# EAGLE board avr_g1000r_24 (EAGLE 9.4.0)
switch and encoder positions ok hole positions ok v4: swapped PB3 - PA5 v5: rework: swap RKJX footprint, E37 flange holes reposition, crosschek drills added C8, C6 from AREF to VCC v8 repositioned, origin and all measuring new aligned drills with case v9 replaced 100n, 22p to 0402 moved drill next to MCU Y+2mm to north, already commited in caqse vector font DRC ok v20: RJKX enlarge pads Alps EC GND drill 2.65mm swap D+/D- DRC ok v21 Testpoints cleanup part names DRC v22 replace tact switches, drills 2mm DRC ok v23 holes for testpins v24 Testpins d 1mm, pitch 1.27 DRC ok
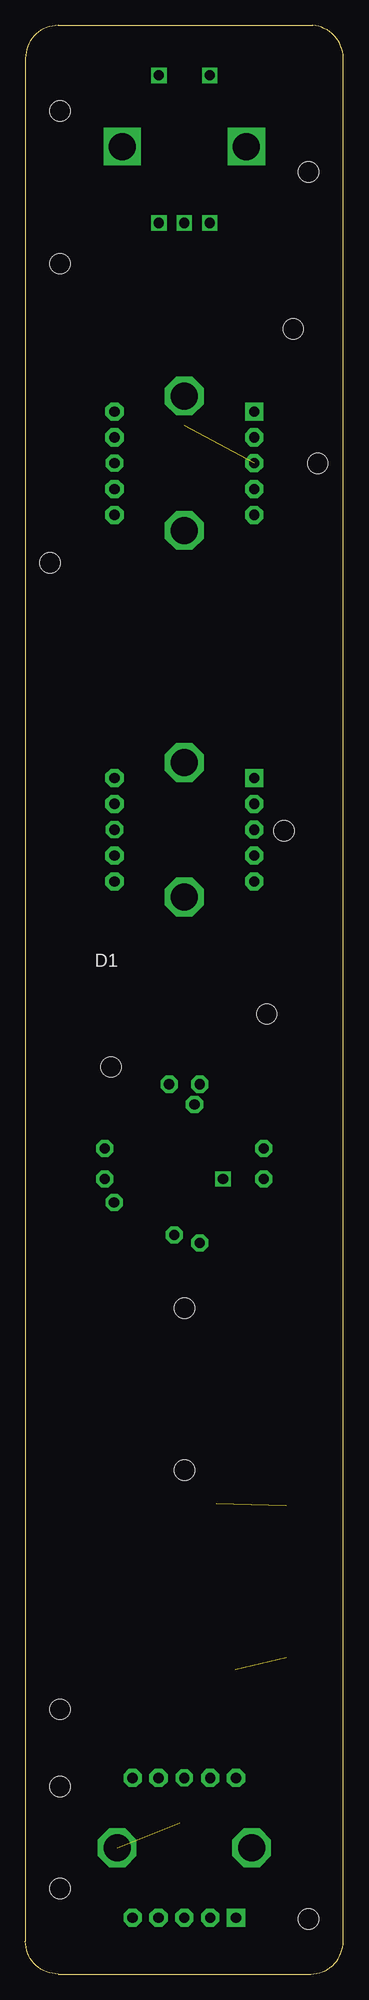
[diagram p0: board, top side]
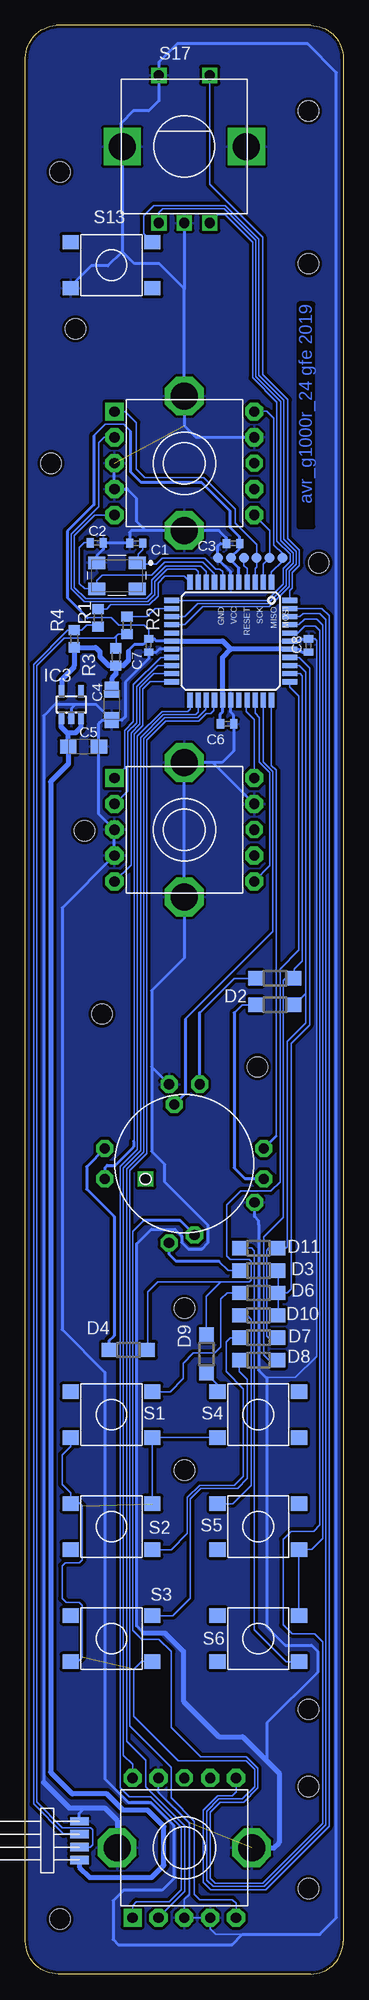
[diagram p1: board, bottom side, seen from below]

Size 31.2 x 191.4 mm. Coordinates in mm from the lower left corner, seen from the top.
Outline: 3.2,0 28,0 arc90 31.2,3.2 31.2,188.2 arc86 28.2,191.4 3.2,191.4 arc90 0,188.2 0,3.2 arc90 3.2,0
Copper layers (1*16): Top 0.035mm / dielectric 1.5mm / Bottom 0.035mm
Design rules "default *": minimum track width 6mil, minimum drill 0.35mm, track to track 6mil, track to pad 6mil, pad to pad 6mil, via to via 6mil, smd to smd 6mil, copper to edge 12mil, drill to drill 6mil, minimum pad ring 10mil, minimum via ring 8mil, stop-mask expansion 4mil, vias tented up to drill 0mil, thermal gap 10mil
Net classes: 0 default: width 0.15 mm, clearance 0.15 mm; 1 GND: width 0.3 mm, clearance 0.15 mm; 2 VCC: width 0.3 mm, clearance 0.15 mm
Holes 2 mm at 3.4,183 27.8,177 3.4,168 28.7,148.4 2.4,138.6 25.4,112.3 23.7,94.3 15.6,65.4 15.6,49.5 3.4,18.4 27.8,5.4 3.4,8.4 26.3,161.6 8.4,89.1 3.4,26

## Footprints (pad centres in the part's own frame; a part is rotated, then mirrored left to right if it is on the bottom)
C0402 = smd 0.7 x 0.9: 1 -0.65,0; 2 0.65,0
SMC_A = smd 1.6 x 1.4: + -1.5,0; - 1.5,0
SOD123 = smd 1.4 x 1.4: A 1.9,0; C -1.9,0
TP10R = smd 1 x 1: TP 0,0
TQFP44 = smd 1.5 x 0.5: 1 -5.8,4; 2 -5.8,3.2; 3 -5.8,2.4; 4 -5.8,1.6; 5 -5.8,0.8; 6 -5.8,0; 7 -5.8,-0.8; 8 -5.8,-1.6; 9 -5.8,-2.4; 10 -5.8,-3.2; 11 -5.8,-4; 23 5.8,-4; 24 5.8,-3.2; 25 5.8,-2.4; 26 5.8,-1.6; 27 5.8,-0.8; 28 5.8,0; 29 5.8,0.8; 30 5.8,1.6; 31 5.8,2.4; 32 5.8,3.2; 33 5.8,4 | smd 0.5 x 1.5: 12 -4,-5.8; 13 -3.2,-5.8; 14 -2.4,-5.8; 15 -1.6,-5.8; 16 -0.8,-5.8; 17 0,-5.8; 18 0.8,-5.8; 19 1.6,-5.8; 20 2.4,-5.8; 21 3.2,-5.8; 22 4,-5.8; 34 4,5.8; 35 3.2,5.8; 36 2.4,5.8; 37 1.6,5.8; 38 0.8,5.8; 39 0,5.8; 40 -0.8,5.8; 41 -1.6,5.8; 42 -2.4,5.8; 43 -3.2,5.8; 44 -4,5.8
SOT23-5 = smd 0.55 x 1.2: 1 -0.95,-1.3; 2 0,-1.3; 3 0.95,-1.3; 4 0.95,1.3; 5 -0.95,1.3
R0603 = smd 1 x 1.1: 1 -0.85,0; 2 0.85,0
B3FS1000 = smd 1.6 x 1.4: 1 -4,2.25; 2 4,2.25; 3 -4,-2.25; 4 4,-2.25
RKJXT1F42001 = drill 1 pad 1.676 octagon: A -1.5,-7.8; B 7.8,-1.5; C 1.5,7.8; COM -1,5.8; D -7.8,1.5; ENC_A -7.8,-1.5; ENC_B 7.8,1.5; ENC_COM -1.5,7.8; GND 6.9,-3.8; PUSH 1,-7 | drill 1 square: POS_LUG -3.8,-1.5
ELMA_E37 = drill 1 pad 1.778 square: P1 -6.858,5.08 | drill 1 pad 1.778 octagon: P2 -6.858,2.54; P3 -6.858,0; P4 -6.858,-2.54; P5 -6.858,-5.08; P6 6.858,-5.08; P7 6.858,-2.54; P9 6.858,2.54; P10 6.858,5.08 | drill 1 pad 1.676 octagon: P8 6.858,0 | drill 2.642 pad 3.81 octagon: P11 0,6.604; P12 0,-6.604
ALPS_EC12E_SW = drill 1 square: A -2.5,-7.5; B 2.5,-7.5; C 0,-7.5; D -2.5,7; E 2.5,7 | drill 2.65 square: GND1 -6.1,0; GND2 6.1,0
HEADER4X1.27 = smd 1.803 x 0.813: P1 0,0; P2 0,1.27; P3 0,2.54; P4 0,3.81
OSCCC500X320X100 = smd 1.662 x 1.262: 1 -1.975,-1.275; 2 1.975,-1.275; 3 1.975,1.275; 4 -1.975,1.275

## Placement (x,y rotation side)
C1  [C0402]  20.32,140.55 180 bottom
C2  [C0402]  24.2,140.58 0 bottom
C3  [C0402]  10.81,140.52 180 bottom
C4  10u  [SMC_A]  22.72,124.67 270 bottom
C5  10u  [SMC_A]  25.49,120.58 0 bottom
C6  [C0402]  11.4,122.8 0 bottom
C7  [C0402]  19.1,130.5 270 bottom
C8  [C0402]  3.4,130.5 90 bottom
D1  [SOD123]  6.7,97.8 0 bottom
D2  [SOD123]  6.7,95.2 0 bottom
D3  [SOD123]  8.3,69.1 0 bottom
D4  [SOD123]  21.1,61.3 0 bottom
D6  [SOD123]  8.3,66.9 0 bottom
D7  [SOD123]  8.3,62.5 0 bottom
D8  [SOD123]  8.3,60.3 0 bottom
D9  [SOD123]  13.43,60.9 90 bottom
D10  [SOD123]  8.3,64.7 0 bottom
D11  [SOD123]  8.3,71.3 0 bottom
GND  PTR1TP10R  [TP10R]  12.3,139.1 0 bottom
IC1  MEGA16-A  [TQFP44]  11.04,130.93 270 bottom
IC3  LP2981M5  [SOT23-5]  26.7,124.7 0 bottom
MISO  PTR1TP10R  [TP10R]  7.22,139.1 0 bottom
MOSI  PTR1TP10R  [TP10R]  5.95,139.1 0 bottom
R1  [R0603]  24.08,133.21 90 bottom
R2  [R0603]  21.22,132.48 270 bottom
R3  1K5  [R0603]  22.32,129.37 270 bottom
R4  1M5  [R0603]  26.42,131.16 270 bottom
RESET  PTR1TP10R  [TP10R]  9.76,139.1 0 bottom
S1  B3FS1000  [B3FS1000]  22.75,54.95 0 bottom
S2  B3FS1000  [B3FS1000]  22.75,43.95 180 bottom
S3  B3FS1000  [B3FS1000]  22.75,32.95 0 bottom
S4  B3FS1000  [B3FS1000]  8.35,54.95 0 bottom
S5  B3FS1000  [B3FS1000]  8.35,43.95 0 bottom
S6  B3FS1000  [B3FS1000]  8.35,32.95 180 bottom
S7  RKJXT1F42001  [RKJXT1F42001]  15.6,79.6 0 bottom
S13  Bootloader  [B3FS1000]  22.75,167.85 0 bottom
S14  ELMA_E37  [ELMA_E37]  15.6,148.4 0 bottom
S15  ELMA_E37  [ELMA_E37]  15.6,112.4 0 bottom
S16  ELMA_E37  [ELMA_E37]  15.6,12.4 90 bottom
S17  ALPS_EC12ALPS_EC12  [ALPS_EC12E_SW]  15.6,179.5 0 bottom
SCK  PTR1TP10R  [TP10R]  8.49,139.1 0 bottom
U$4  HEADER4X1.27  [HEADER4X1.27]  25.9,11.2 0 bottom
VCC  PTR1TP10R  [TP10R]  11.03,139.1 0 bottom
Y1  12MHz  [OSCCC500X320X100]  22.21,137.34 180 bottom

## Library data of the parts
C1-C8 = rcl; SPICEPREFIX: C
D1-D4 D6-D11 = diode; SPICEPREFIX: D
GND MISO MOSI RESET SCK VCC = testpad
IC1 = atmel; MPN: ATMEGA16-16AU; OC_FARNELL: 9171134; OC_NEWARK: 96K6515
IC3 = v-reg-3
R1-R4 = rcl; SPICEPREFIX: R
S1 = omron b3fs1000; SPICEPREFIX: S
S2-S6 S13 = omron b3fs1000
S7 = RKJXT1F42001
S14-S16 = elma e37
S17 = alps_ec12
U$4 = header4x1.27
Y1 = euroquartz

## Nets
D1: D1.C S7.C
D2: D2.C S7.B
D3: D3.C S7.A
D4: D4.C S7.D
D7: D7.C S2.1
D8: D8.C S3.2
D10: D10.C S5.1
D11: D11.C S6.1
D+: R1.1 R4.1 U$4.P3
D-: R2.2 R3.1 U$4.P2
GND [GND]: C1.2 C2.2 C3.2 C4.- C5.- C6.2 C7.2 C8.2 GND.TP IC1.6 IC1.18 IC1.28 IC1.39 IC3.2 S7.ENC_COM S7.GND S13.3 S14.P3 S14.P4 S14.P9 S14.P11 S14.P12 S15.P3 S15.P4 S15.P9 S15.P11 S15.P12 S16.P3 S16.P4 S16.P9 S16.P11 S16.P12 S17.C S17.D S17.GND1 S17.GND2 U$4.P4 Y1.2
N$1: D9.C S4.1
N$5: IC1.21 S15.P5
N$6: D6.C S1.2
PA0: D3.A D6.A D10.A IC1.37
PA1: D2.A D7.A D11.A IC1.36
PA2: D1.A D8.A IC1.35
PA3: D4.A D9.A IC1.34
PA4: IC1.33 S7.ENC_B
PA5: IC1.32 S7.COM
PA6: IC1.31 S15.P6
PA7: IC1.30 S15.P10
PB0: IC1.40 S7.PUSH
PB1: IC1.41 S5.4 S6.3
PB2: IC1.42 S1.3 S1.4 S2.3 S2.4 S3.3 S3.4 S4.3
PB3: IC1.43 S16.P6
PB4: IC1.44 S17.E
PB5: IC1.1 MOSI.TP S14.P10
PB6: IC1.2 MISO.TP S14.P6
PB7: IC1.3 S14.P1 SCK.TP
PC0: IC1.19 S15.P1
PC1: IC1.20 S15.P2
PC3: IC1.22 S7.ENC_A
PC4: IC1.23 S16.P1
PC5: IC1.24 S16.P10
PC6: IC1.25 S16.P2
PC7: IC1.26 S16.P5
PD0: IC1.9 S14.P5
PD1: IC1.10 S14.P2
PD2: IC1.11 R1.2
PD3: IC1.12 S17.B
PD4: IC1.13 R2.1
PD5: IC1.14 S17.A
PD6: IC1.15 S13.2
RESET: IC1.4 RESET.TP
V5V: C5.+ IC3.1 IC3.3 U$4.P1
VCC: C3.1 C4.+ C6.1 C7.1 C8.1 IC1.5 IC1.17 IC1.27 IC1.38 IC3.5 R3.2 R4.2 VCC.TP
XTAL1: C2.1 IC1.8 Y1.3
XTAL2: C1.1 IC1.7 Y1.1

## Tracks (layer width: path | path; a pad name or v marks a point on that pad's centre or on a via)
D1
  Bottom 0.152: 14.1,94.4 10.7,97.8 D1.C
  Bottom 0.305: S7.C 14.1,94.4
D2
  Bottom 0.152: 10.7,94.4 9.9,95.2 D2.C
  Bottom 0.305: S7.B 9.6,78.1 10.7,79.2 10.7,94.4
D3
  Bottom 0.152: 12.2,70 11.3,69.1 D3.C
  Bottom 0.305: S7.A 17.1,70.7 16.4,70 12.2,70
D4
  Bottom 0.3: 25.2,77.1 22.5,74.4 22.5,62.7 23,62.2 D4.C
  Bottom 0.305: S7.D 25.2,79.3 25.2,77.1
D7
  Bottom 0.152: D7.C 11.1,62.5 11.5,62.1 11.5,59.2 9.8,57.5 9.8,48.9 10.7,48 14.1,48 15.3,46.8 15.3,43.28 16.9,41.68 18.73,41.68 S2.1
D8
  Bottom 0.152: D8.C 10.2,59.2 9.4,58.4 9.4,48.67 10.37,47.7 13.97,47.7 14.99,46.67 14.99,36.92 16.72,35.2 S3.2
D10
  Bottom 0.152: D10.C 9.4,64.7 9.01,64.31 9.01,48.01 10.82,46.2 S5.1
D11
  Bottom 0.152: D11.C 9,71.3 8.71,71.01 8.71,33.8 5.6,30.68 4.37,30.68 S6.1
D+
  Bottom 0.152: R1.1 24.22,132.5 25.2,132.5 25.69,132.01 R4.1 27.03,132 30.41,128.63 30.41,16.7 27.47,13.77 25.63,13.77 25.66,13.74 U$4.P3
D-
  Bottom 0.152: R2.2 22.07,131.63 22.3,131.4 | 22.3,131.4 22.3,130.24 R3.1 | 22.3,131.4 22.5,131.2 27.4,131.2 30.1,128.5 30.1,16.9 27.57,14.38 24.8,14.38 24.6,14.17 24.6,12.7 24.83,12.47 U$4.P2
GND  (2 unrouted)
  Bottom 0.152: S16.P9 18.14,17.87 15.13,14.87 15.13,7.81 15.6,7.34 S16.P3 S16.P4 13.06,4.46 12.5,3.9 9.9,3.9 9.8,3.9 | 7.5,58.6 4.7,58.6 2.62,60.68 2.62,131 2.79,131.18 3.37,131.18 C8.2
  Bottom 0.3: 26.3,124.7 26.7,124.3 IC3.2 | 26.3,124.7 24.25,124.7 C4.- 21.72,123.17 21.4,123.49 21.4,126.9 19.1,129.2 C7.2 19.05,129.8 18.4,129.8 18.07,130.13 IC1.18 | S17.D 18.1,184 19.1,183 20.6,183 21.8,181.8 21.8,179.5 S17.GND1 21.7,169.2 | S14.P9 14.47,150.94 15.6,152.07 S14.P11 15.6,165.53 | 15.6,165.53 18.07,168 20.5,168 21.7,169.2 | 21.7,169.2 23.1,167.8 24.72,167.8 26.75,165.77 S13.3 | 19.6,33.5 20.28,34.18 20.28,71.72 18.84,73.16 16.54,73.16 15.86,72.48 15.86,71.86 15.24,71.24 13.86,71.24 13.3,71.81 13.3,73.6 17.5,77.8 17.5,79.5 18.8,80.8 18.8,89.1 | 26.3,124.7 28.3,124.7 29.42,123.58 29.42,18.82 | S17.C 15.6,165.53 | 11,136.77 IC1.6 11.04,137.74 12.3,139 GND.TP 12.3,140.26 | S7.GND 8.7,74.4 8.29,74 8.29,73.63 | S15.P12 15.6,99.8 18.8,96.6 18.8,89.1 | 18.8,89.1 S7.ENC_COM | 7.2,20.63 7.5,20.93 7.5,24.65 2.49,29.66 2.49,31.7 3.1,32.3 5.7,32.3 7.5,34.1 7.5,58.5 7.5,58.6 | S15.P4 27.6,104.72 27.6,63.3 23.4,59.1 23.4,19.16 21.09,16.86 18.89,16.86 16.64,14.61 16.64,9.37 17.77,8.24 21.56,8.24 22.6,7.2 22.6,3.4 22.1,2.9 10.9,2.9 9.9,3.9 | 11.54,117.73 12.81,119 | 12.81,119 S15.P11 | C3.2 11.46,141.06 12.2,141.8 S14.P12 19.4,141.8 | 19.4,141.8 20.8,141.8 20.97,141.63 C1.2 23.52,140.55 C2.2 23.55,139.95 24.18,139.31 Y1.2 | 21.2,145.86 20.3,144.96 20.3,142.7 19.4,141.8 | 5.21,130.9 IC1.39 4.37,130.93 4.15,131.15 C8.2 | IC1.28 11.04,123.94 10.75,123.65 C6.2 10.75,120.15 11.9,119 12.81,119 | U$4.P4 25.9,15.81 25.4,16.31
  Bottom 0.305: S14.P3 S14.P4 21.2,145.86 | 11.4,140.52 C3.2 12.04,140.52 12.3,140.26 | C4.- 23.63,123.17 23.99,122.81 C5.- 23.99,113.93 S15.P3 S15.P4 | S15.P9 11.54,117.73 | 7.5,58.5 8.29,59.3 8.29,73.63 | 25.1,16.21 25,16.31 | 9.9,3.9 2.3,3.9 0.66,5.54 0.66,186.76 3.5,189.6 16.3,189.6 18.1,187.8 S17.D | S15.P12 S15.P11
  Bottom 0.5: S16.P12 6.8,12.4 6.3,12.9 6.3,19.73 7.2,20.63 9.87,23.3 12.21,23.3 15.7,26.8 15.7,31.7 17.5,33.5 19.6,33.5 | 22.2,15.1 23.41,16.31 25,16.31 25.4,16.31 26.91,16.31 29.42,18.82
  Bottom 0.508: 22.2,15.1 S16.P11
  pour Bottom (isolate 0.305): -3.9,193.7 -3.9,-2.9 35.6,-2.9 35.6,193.7
N$1
  Bottom 0.152: S4.1 12.35,57.92 D9.C
N$5
  Bottom 0.152: IC1.21 18.59,127.73 19.98,126.34 19.98,122.75 20.84,121.9 20.84,108.94 S15.P5
N$6
  Bottom 0.152: D6.C 11.4,66.9 12.01,66.3 12.01,61.59 12.6,61 14.7,61 15.7,60 15.7,58.5 17,57.2 S1.2
PA0
  Bottom 0.152: IC1.37 4.33,129.33 3.29,128.29 3.29,93.2 5.1,91.39 5.1,67.3 5.5,66.9 D6.A | D6.A D10.A | D3.A D6.A
PA1
  Bottom 0.152: IC1.36 4.33,128.53 3.67,127.87 3.67,96.3 | 3.67,96.3 3.67,93.43 5.5,91.6 5.5,71.4 5.6,71.3 D11.A 7.3,71.3 7.5,71.1 7.5,62.7 7.3,62.5 D7.A | D2.A 4.77,95.2 3.67,96.3
PA2
  Bottom 0.152: IC1.35 4.23,127.73 4,127.5 4,99.5 4.8,98.7 D1.A 5.7,97.8 5.89,97.61 5.89,74.31 7.8,72.4 7.8,60.8 7.3,60.3 D8.A
PA3
  Bottom 0.152: IC1.34 5.24,126.43 4.34,125.53 4.34,100.58 6.2,98.72 6.2,77.81 7.09,76.92 10.06,76.92 11.42,75.56 11.42,70.52 11.1,70.2 9.2,70.2 9.01,70.01 9.01,68.2 9.21,68 12,68 | D4.A 19.2,67 18.2,68 12,68 | 12,68 13.43,66.57 D9.A
PA4
  Bottom 0.152: IC1.33 7.04,118.7 6.59,118.25 6.59,82.31
  Bottom 0.305: 6.59,82.31 S7.ENC_B
PA5
  Bottom 0.152: IC1.32 7.84,119.07 6.89,118.13 6.89,102.41 15.5,93.8
  Bottom 0.305: 15.5,93.8 15.5,86.5 S7.COM
PA6
  Bottom 0.152: IC1.31 8.64,123.84 8.24,123.44 8.24,119.04 7.2,118 7.2,108.86 S15.P6
PA7
  Bottom 0.152: S15.P10 8.74,123.24 9.5,124 9.5,125.07 IC1.30
PB0
  Bottom 0.152: IC1.40 4.44,131.73 3.76,132.41 2.74,132.41 2.3,131.97 2.3,44.1 2.9,43.5 5.1,43.5 5.9,42.7 5.9,34.3 5,33.4 2.8,33.4 2.02,32.62 2.02,14.78 7.89,8.91 12.55,8.91 13.07,9.43 13.07,15.9 12.08,16.89 9.78,16.89 8.39,18.27 8.39,20.23 9.5,21.33 13.98,21.33 16.88,24.23 16.88,31.68 18.1,32.9 19.8,32.9 20.66,33.76 20.66,72.94 19.6,74
  Bottom 0.305: S7.PUSH 16,74 19.6,74
PB1
  Bottom 0.152: IC1.41 4.34,132.53 3.77,133.1 2.6,133.1 1.99,132.5 1.99,42.8 3.1,41.7 S5.4 S6.3
PB2  (2 unrouted)
  Bottom 0.152: S3.3 26,30.72 25.6,31.12 25.6,36.2 25.9,36.5 27.2,36.5 27.6,36.9 27.6,40.1 27.3,40.4 25.9,40.4 25.6,40.7 25.6,46 25.9,46.3 26.75,46.3 | S4.3 S1.4 | 18.6,52.71 S1.4 | IC1.42 4.24,133.33 3.94,133.63 2.3,133.63 1.69,133.02 1.69,14.64 7.73,8.61 12.77,8.61 13.4,9.23 13.4,16 12.21,17.2 9.91,17.2 8.7,18.4 8.7,20.1 9.53,20.93 16.2,20.93 20.58,25.3 20.58,29.94 19.8,30.72 18.77,30.72 S3.4 | 26.75,46.3 26.75,47.25 27.6,48.1 27.6,51 26.75,51.85 S1.3 | 26.75,46.3 S2.4 | S1.4 S2.3
PB3
  Bottom 0.152: IC1.43 2.1,134.13 1.38,133.41 1.38,14.52 7.6,8.3 13,8.3 13.73,9.03 13.73,16.1 12.33,17.5 10.9,17.5 10.52,17.88 S16.P6
PB4
  Bottom 0.152: S17.E 13.1,175.8 7.9,170.6 7.9,157.1 5.44,154.64 5.44,140.98 4.3,139.84 4.3,138.36 4.99,137.67 4.99,136.15 5.24,135.9 IC1.44
PB5
  Bottom 0.152: S14.P10 8.72,153.5 7.5,153.5 6.8,152.81 6.8,140.62 6.8,140.35 5.95,139.5 MOSI.TP 5.95,138.8 7.04,137.71 IC1.1
PB6
  Bottom 0.152: IC1.2 7.84,138.48 MISO.TP 7.22,141.8 S14.P6
PB7
  Bottom 0.152: S14.P1 21.38,153.48 20.3,152.4 20.3,147.8 19.5,147 13.7,147 10.6,143.9 10.6,142.5 8.49,140.39 SCK.TP 8.49,138.2 8.64,138.05 IC1.3
PC0
  Bottom 0.152: IC1.19 17.91,129.33 20.59,126.64 20.59,123.01 21.46,122.14 21.46,118.48 S15.P1
PC1
  Bottom 0.152: S15.P2 22.4,114.94 21.14,116.2 21.14,122.03 20.29,122.88 20.29,126.47 18.22,128.53 IC1.20
PC3
  Bottom 0.152: IC1.22 18.96,126.93 19.68,126.21 19.68,122.63 20.53,121.78 20.53,81.8 20.58,81.8
  Bottom 0.305: S7.ENC_A 23.4,79.2 23.17,79.43 22.4,79.43 20.58,81.25 20.58,81.8
PC4
  Bottom 0.152: IC1.23 15.04,124.23 15.24,124.03 17.77,124.03 20.2,121.6 20.2,81 21.9,79.3 21.9,18.3 21,17.4 18.9,17.4 15.9,14.4 15.9,8.3 17.1,7.1 20.3,7.1 20.68,6.72 S16.P1
PC5
  Bottom 0.152: IC1.24 14.24,123.96 14.5,123.7 17.67,123.7 19.89,121.47 19.89,80.87 21.59,79.18 21.59,21.49 20.68,20.58 S16.P10
PC6
  Bottom 0.152: S16.P2 15.54,8.14 15.54,14.54 19.4,18.4 19.4,21 21.27,22.87 21.27,79.07 19.59,80.75 19.59,121.35 17.54,123.4 14.31,123.4 13.5,124.2 13.5,125.07 IC1.25
PC7
  Bottom 0.152: S16.P5 10.52,6.94 10.88,7.3 14.1,7.3 14.62,7.82 14.62,15.02 16.9,17.3 16.9,20.3 20.97,24.36 20.97,78.94 19.29,80.62 19.29,121.22 17.42,123.09 14.18,123.09 13.47,123.8 13,123.8 12.7,124.1 12.7,125.07 IC1.26
PD0
  Bottom 0.152: S14.P5 24.38,143.32 26.4,141.3 26.4,136.2 25.3,135.1 19.34,135.1 18.8,135.64 18.8,136.9 17.4,138.3 14,138.3 13.44,137.74 IC1.9
PD1
  Bottom 0.152: S14.P2 23.46,150.94 24,150.4 24,144.13 26.7,141.43 26.7,136.07 25.43,134.8 19.17,134.8 18.49,135.48 18.49,136.78 17.27,138 14.49,138 14.24,137.74 IC1.10
PD2
  Bottom 0.152: R1.2 23.24,134.06 22.81,134.49 19.05,134.49 18.18,135.35 18.18,136.62 17.5,137.3 15.61,137.3 IC1.11
PD3
  Bottom 0.152: S17.B 12.3,172.8 11.6,172.8 8.9,170.1 8.9,156.8 6.5,154.4 6.5,140.75 5.22,139.47 5.22,138.74 5.91,138.05 5.91,136.53 7.5,134.93 IC1.12
PD4
  Bottom 0.152: IC1.13 18.47,134.13 19.27,133.33 R2.1
PD5
  Bottom 0.152: S17.A 18.1,173 17.7,173.4 11.7,173.4 8.6,170.3 8.6,156.93 6.13,154.47 6.13,140.81 4.91,139.59 4.91,138.61 5.6,137.92 5.6,136.4 7.4,134.6 14.3,134.6 15.57,133.33 IC1.14
PD6
  Bottom 0.152: IC1.15 15.54,132.53 13.77,134.3 7.27,134.3 5.29,136.27 5.29,137.8 4.61,138.48 4.61,139.72 5.83,140.94 5.83,154.59 8.29,157.05 8.29,170.42 11.57,173.71 18.59,173.71 19.6,172.7 19.6,170.95 S13.2
RESET
  Bottom 0.152: RESET.TP 9.76,138.36 9.44,138.04 IC1.4
V5V
  Bottom 0.152: C5.+ | 27.7,123.35 IC3.1
  Bottom 0.305: 27,121.8 27.1,121.9
  Bottom 0.5: C5.+ 27,121.8 | 27.7,123.35 27.7,122.5 27.1,121.9 26.3,121.9 25.75,122.45 IC3.3
  Bottom 0.508: C5.+ 26.99,118.85 28.73,117.11 28.73,19.83 26.6,17.7 23.2,17.7 21.6,16.1 19.2,16.1 17.6,14.5 17.6,10.7 18.8,9.5 24.9,9.5 25.9,10.5 U$4.P1
VCC
  Bottom 0.152: 11.85,130.93 11.84,130.94 | 20.86,151.53 21.56,152.23 23.35,152.23 24.48,151.11 | 25.12,133.23 22.79,133.23 22.06,132.5 19.54,132.5 19.1,132.06 C7.1
  Bottom 0.3: 26.42,128.48 26.42,128.38 | IC1.27 11.84,123.96 12.05,123.75 C6.1 | 11.09,142.08 10.16,141.15 C3.1 10.16,140.03 11.03,139.16 VCC.TP 11.03,138.9 10.24,138.11 IC1.5 | IC1.38 4.33,130.13 4.05,129.85 C8.1 | IC1.17 18.33,130.93 18.55,131.15 C7.1 19.65,130.6 20.5,130.6 21.1,130 21.1,129.9
  Bottom 0.305: 11.09,142.08 11.09,143.7 13.91,146.52 19.83,146.52 20.86,147.55 20.86,151.53 | 24.48,151.11 24.48,144.32 27.09,141.71 27.09,135.2 25.12,133.23
  Bottom 0.5: IC1.17 11.85,130.93 | 11.03,130.13 11.84,130.94 | IC1.38 11.03,130.13 | IC1.27 11.84,129.32 11.03,130.13 | R3.2 22.32,127.68 22.72,127.28 C4.+ | 26.42,128.38 27.65,127.15 IC3.5 | 21.1,129.9 21.1,129 21.58,128.52 R3.2 | 26.42,128.48 R4.2 24.31,130.31 23.9,129.9 23.9,129.4 23.02,128.52 R3.2
XTAL1
  Bottom 0.152: IC1.8 12.64,137.54 13.8,138.7 17.5,138.7 18.8,137.4 23.65,137.4 24.18,136.87 Y1.3 24.15,136.1 25.4,136.1 25.9,136.6 25.9,140.1 25.42,140.58 C2.1
XTAL2
  Bottom 0.152: 20.11,138.49 18.36,138.49 17.76,139.09 13.59,139.09 12.5,138 12.1,138 11.84,137.74 IC1.7 | 20.11,138.49 Y1.1 | C1.1 19.67,139.93 20.11,139.49 20.11,138.49

## Text on the board
Bottom: avr_g1000r_24 gfe 2019